# Altium PCB MN_BUCK113b_PCB.PcbDoc
Units mil, origin at the board's own origin, x right, y up, seen from the top; angles counter-clockwise.
Board outline 6000 x 4000 mil, 2 copper layers (Top Layer, Bottom Layer); 81 components, 43 nets, 217 pads, 0 vias.
Unrouted connection lines stored in the file: 164.
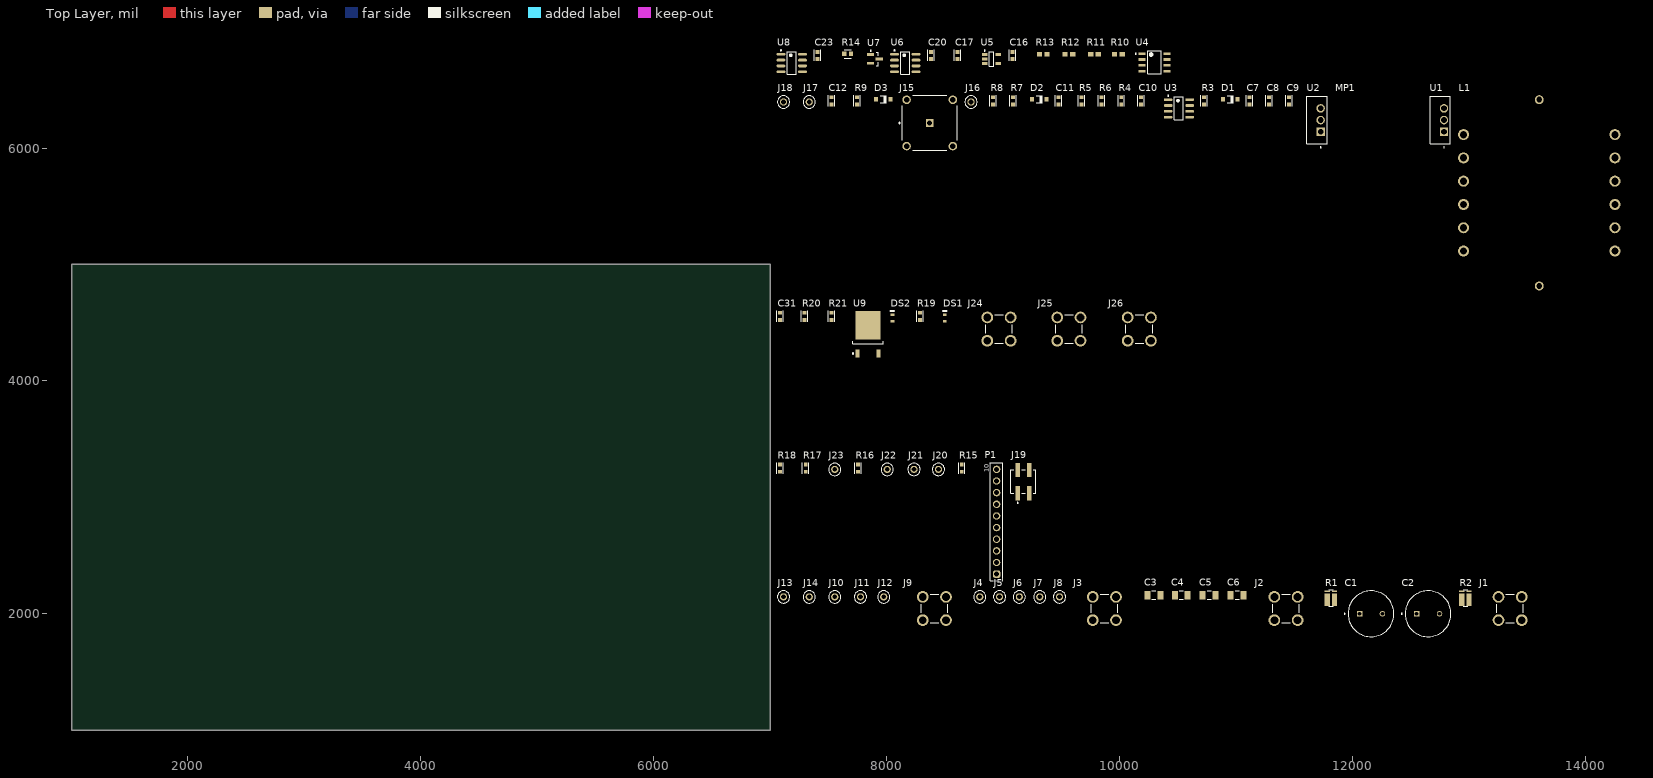
[diagram p0: Top Layer view]
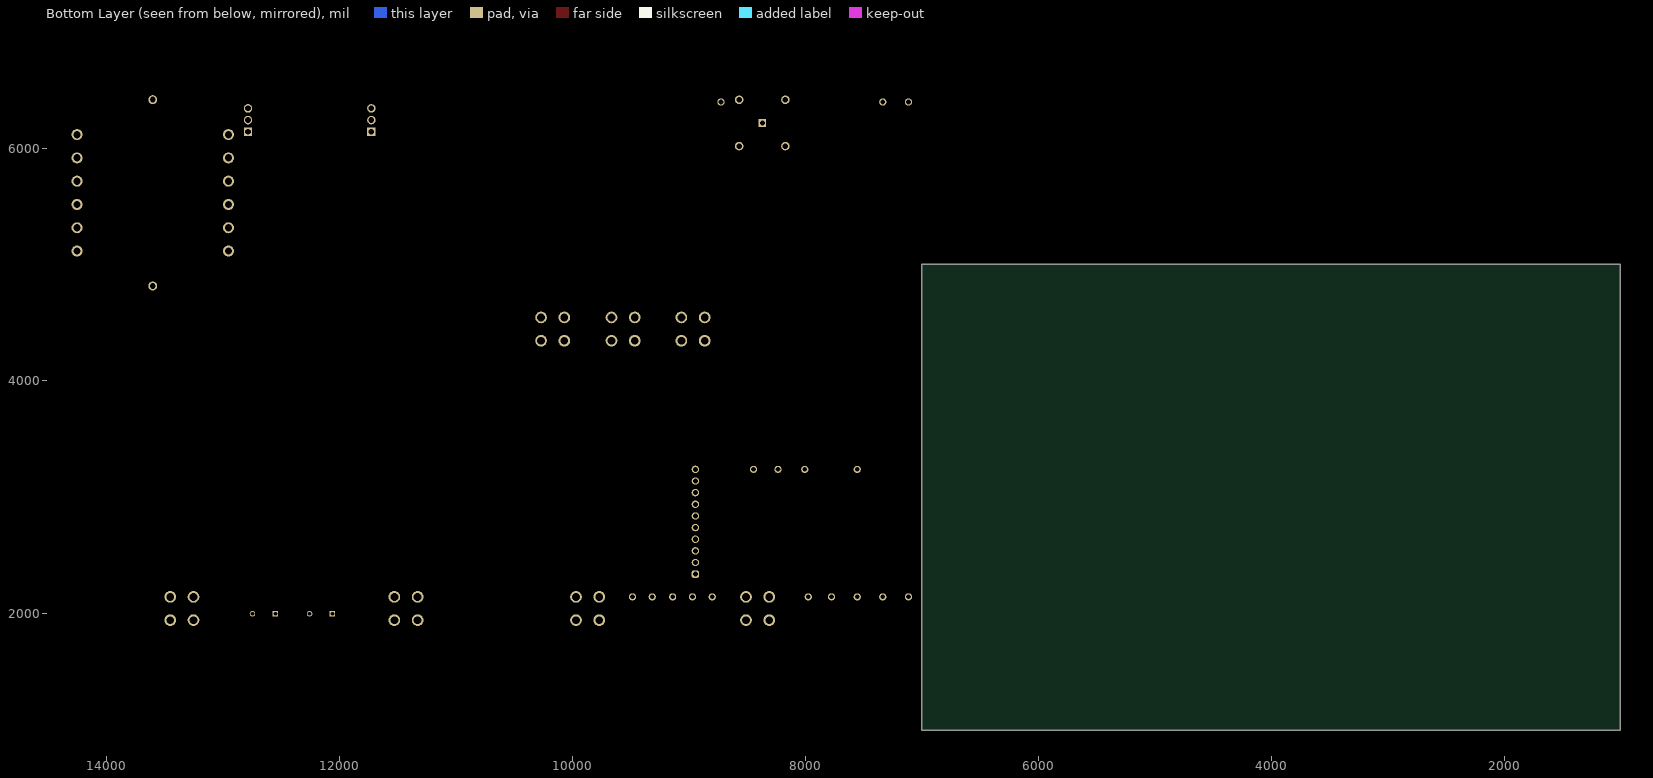
[diagram p1: Bottom Layer view, seen from below]

## Layer stack, top to bottom
Top Solder: solder mask 0.4, Solder Resist, Dk 3.5
Top Layer: signal copper 1.4
Dielectric 1: dielectric 12.6, FR-4, Dk 4.8
Bottom Layer: signal copper 1.4
Bottom Solder: solder mask 0.4, Solder Resist, Dk 3.5

## Board outline
1000,1000 7000,1000 7000,5000 1000,5000

## Design rules (kind name [scope] priority, off if disabled: settings)
Clearance [All] p1: gap=10 ignorepadtopadclearanceinfootprint=FALSE except(0: Arc-Hole Track-Hole SMDPad-Hole THPad-Hole Via-Hole Fill-Hole Poly-Hole Region-Hole Text-Hole)
PolygonConnect [All] p1: connectstyle=Relief reliefconductorwidth=10 reliefentries=4 polygonreliefangle="90 Angle" airgapwidth=10
RoomDefinition U_Sensing [InComponentClass('U_Sensing')] p1: confinementstyle=ConfineIn formatcopy=TRUE lockcomponents=FALSE outline 7045,6615 10450,6615 10450,6955 7045,6955
RoomDefinition U_PowerStage [InComponentClass('U_PowerStage')] p2: confinementstyle=ConfineIn formatcopy=TRUE lockcomponents=FALSE outline 7045,4765 14315,4765 14315,6565 7045,6565
RoomDefinition U_HotelRail [InComponentClass('U_HotelRail')] p3: confinementstyle=ConfineIn formatcopy=TRUE lockcomponents=FALSE outline 7045,3460 10455,3460 10455,4715 7045,4715
RoomDefinition U_DigitalInterface [InComponentClass('U_DigitalInterface')] p4: confinementstyle=ConfineIn formatcopy=TRUE lockcomponents=FALSE outline 7045,2270 9295,2270 9295,3410 7045,3410
RoomDefinition TOPSHEET [InComponentClass('TOPSHEET')] p5: confinementstyle=ConfineIn formatcopy=TRUE lockcomponents=FALSE outline 7045,1060 13640,1060 13640,2315 7045,2315
RoutingVias [All] p1: holewidth=28 width=50 viastyle="Through Hole" minholewidth=28 minwidth=50 maxholewidth=28 maxwidth=50
SolderMaskExpansion [All] p1: expansion=4 istentingtop=FALSE
Width [All] p1: maxlimit=10 minlimit=10 preferedwidth=10
30 further rules are at their usual default settings.

## Classes and differential pairs
component class U_Sensing: C13 C14 C15 C16 C17 C18 C19 C20 C21 C22 C23 C24 C25 R10 R11 R12 R13 R14 U4 U5 U6 U7 U8
component class U_PowerStage: C7 C8 C9 C10 C11 C12 D1 D2 D3 J15 J16 J17 J18 L1 MP1 R3 R4 R5 R6 R7 R8 R9 U1 U2 U3
component class U_HotelRail: C30 C31 DS1 DS2 J24 J25 J26 R19 R20 R21 U9
component class U_DigitalInterface: C26 C27 C28 C29 J19 J20 J21 J22 J23 P1 R15 R16 R17 R18
component class TOPSHEET: C1 C2 C3 C4 C5 C6 J1 J2 J3 J4 J5 J6 J7 J8 J9 J10 J11 J12 J13 J14 R1 R2

## Components (designator, comment, footprint, x,y, rotation, side; value= is the part's Value field where it differs from the comment)
C1 "470uF 10mm" CAPPRD500W60D1000H2200 12160,2000 r0 top
C2 "470uF 10mm" CAPPRD500W60D1000H2200 12650,2000 r0 top
C3 "12065C475KAT2A" FP-1206-L_3_2_0_2-W_1_6_0-IPC_B 10295,2160 r0 top
C4 "12065C475KAT2A" FP-1206-L_3_2_0_2-W_1_6_0-IPC_B 10530,2160 r0 top
C5 "12065C475KAT2A" FP-1206-L_3_2_0_2-W_1_6_0-IPC_B 10770,2160 r0 top
C6 "12065C475KAT2A" FP-1206-L_3_2_0_2-W_1_6_0-IPC_B 11010,2160 r0 top
C7 "0.10µF" SMD-0603-RES 11115,6405 r0 top
C8 "0.10µF" SMD-0603-RES 11285,6405 r0 top
C9 "10µF" SMD-0603-RES 11455,6405 r0 top
C10 "0.1µF" SMD-0603-RES 10185,6405 r0 top
C11 "0.1µF" SMD-0603-RES 9475,6405 r0 top
C12 "1µF" SMD-0603-RES 7525,6405 r0 top
C16 "2.2µF" SMD-0603-RES 9080,6795 r0 top
C17 "10µF" SMD-0603-RES 8610,6795 r0 top
C20 "10pF" SMD-0603-RES 8380,6795 r0 top
C23 "10pF" SMD-0603-RES 7405,6795 r0 top
C31 "10µF" SMD-0603-RES 7085,4555 r0 top
D1 "1N4148W-7-F" DIOD-SOD123-2_V 10950,6420 r0 top
D2 "1N4148W-7-F" DIOD-SOD123-2_V 9310,6420 r0 top
D3 "1N4148W-7-F" DIOD-SOD123-2_V 7970,6420 r0 top
DS1 "TLMS1000-GS08" VISH-TLMS1000_V 8500,4540 r90 top
DS2 "TLMS1000-GS08" VISH-TLMS1000_V 8050,4540 r90 top
J1 "CT3151-2" CALTEST_CT3151-2 13355,2045 r0 top
J2 "CT3151-0" CT3151-0 11430,2045 r0 top
J3 "CT3151-2" CALTEST_CT3151-2 9870,2045 r0 top
J4 "5001" FP-5001-MFG 8800,2145 r0 top
J5 "5001" FP-5001-MFG 8970,2145 r0 top
J6 "5001" FP-5001-MFG 9140,2145 r0 top
J7 "5001" FP-5001-MFG 9315,2145 r0 top
J8 "5001" FP-5001-MFG 9485,2145 r0 top
J9 "CT3151-0" CT3151-0 8410,2045 r0 top
J10 "5001" FP-5001-MFG 7555,2145 r0 top
J11 "5001" FP-5001-MFG 7775,2145 r0 top
J12 "5001" FP-5001-MFG 7975,2145 r0 top
J13 "5001" FP-5001-MFG 7115,2145 r0 top
J14 "5001" FP-5001-MFG 7335,2145 r0 top
J15 "1-1337445-0" FP-1-1337445-0-MFG 8370,6215 r0 top
J16 "5001" FP-5001-MFG 8725,6395 r0 top
J17 "5001" FP-5001-MFG 7335,6395 r0 top
J18 "5001" FP-5001-MFG 7115,6395 r0 top
J19 "M20-8760242" FP-M20-8760242-MFG 9175,3135 r0 top
J20 "5001" FP-5001-MFG 8445,3240 r0 top
J21 "5001" FP-5001-MFG 8235,3240 r0 top
J22 "5001" FP-5001-MFG 8005,3240 r0 top
J23 "5001" FP-5001-MFG 7555,3240 r0 top
J24 "CT3151-2" CALTEST_CT3151-2 8965,4445 r0 top
J25 "CT3151-2" CALTEST_CT3151-2 9565,4445 r0 top
J26 "CT3151-0" CT3151-0 10170,4445 r0 top
L1 "B65816C1512T001" B65816C1512T001 12955,6115 r0 top
MP1 "507302B00000G" FP-507302B00000G-MFG 12225,6075 r0 top
P1 "61301011121" 61301011121 8945,2790 r90 top
R1 "2.5m, 2%" OHMITE_FC4L32 11815,2135 r0 top value=2.5m
R2 "2.5m, 2%" OHMITE_FC4L32 12970,2135 r0 top value=2.5m
R3 "1" SMD-0603-RES 10725,6405 r0 top
R4 "10" SMD-0603-RES 10015,6405 r0 top
R5 "10" SMD-0603-RES 9675,6405 r0 top
R6 "10" SMD-0603-RES 9845,6405 r0 top
R7 "1" SMD-0603-RES 9085,6405 r0 top
R8 "10" SMD-0603-RES 8915,6405 r0 top
R9 "1" SMD-0603-RES 7745,6405 r0 top
R10 "TNPW0603100KBEEA" RESC1609X55X30ML10T20 9990,6805 r0 top
R11 "TNPW0603100KBEEA" RESC1609X55X30ML10T20 9785,6805 r0 top
R12 "TNPW0603100KBEEA" RESC1609X55X30ML10T20 9565,6805 r0 top
R13 "TNPW0603100KBEEA" RESC1609X55X30ML10T20 9345,6805 r0 top
R14 "CRCW06032K94FKEA" FP-CRCW0603-e3-IPC_B 7665,6810 r0 top
R15 "120" SMD-0603-RES 8645,3250 r0 top
R16 "120" SMD-0603-RES 7755,3250 r0 top
R17 "120" SMD-0603-RES 7305,3250 r0 top
R18 "120" SMD-0603-RES 7085,3250 r0 top
R19 "120" SMD-0603-RES 8285,4555 r0 top
R20 "100" SMD-0603-RES 7295,4555 r0 top
R21 "100" SMD-0603-RES 7525,4555 r0 top
U1 "IRFZ48NPBF" TO254P1041X444X1930-3 12755,6240 r90 top
U2 "IRFZ48NPBF" TO254P1041X444X1930-3 11695,6240 r90 top
U3 "LM5109BMAX" M08A_L 10510,6340 r0 top
U4 "LM358DR" FP-D0008A-MFG 10300,6735 r0 top
U5 "LP2985-50DBVR" DBV0005A_M 8900,6765 r0 top
U6 "LT1999CS8-50#PBF" LT-S8-8_L 8160,6730 r0 top
U7 "ADR1581ARTZ-REEL7" ADI-RT-3_N 7900,6765 r0 top
U8 "LT1999CS8-50#PBF" LT-S8-8_L 7185,6730 r0 top
U9 "LD1117ADT33TR" TO-252_L 7840,4400 r90 top

## Footprints (in the part's own frame and the unit in brackets; to place one, negate y for a bottom-side part, rotate by r counter-clockwise, add the part's x,y. Pads: shape width x height; smd on the part's side, far side on the other; paste and mask are expansions set on the pad)
61301011121 [mm]
  rrect50% 1.6x1.6 hole 1.1: 1(-11.43,0)
  round 1.6 hole 1.1: 2(-8.89,0) 3(-6.35,0) 4(-3.81,0) 5(-1.27,0) 6(1.27,0) 7(3.81,0) 8(6.35,0) 9(8.89,0) 10(11.43,0)
  silkscreen extent -12.85,-1.35 12.85,1.35, body extent -12.7,-1.27 12.7,1.27, height 8.57
ADI-RT-3_N [mm]
  rect 1.6x0.6 smd: 1(-0.96,0.96) 2(-0.96,-0.96) 3(0.96,0)
  silkscreen extent -1.02,-1.5 0.7,1.92, body extent -0.7,-1.52 0.7,1.52, height 1.12
B65816C1512T001 [mm]
  round 2.4 hole 1.6: 1(0,0) 2(0,-5.08) 3(0,-10.16) 4(0,-15.24) 5(0,-20.32) 6(0,-25.4) 7(33.02,-25.4) 8(33.02,-20.32) 9(33.02,-15.24) 10(33.02,-10.16) 11(33.02,-5.08) 12(33.02,0)
  round 1.95 hole 1.3: G1(16.51,7.62) G2(16.51,-33.02)
CALTEST_CT3151-2 [mm]
  round 2.55 hole 1.7: 1(-2.54,2.54) 2(2.54,2.54) 3(-2.54,-2.54) 4(2.54,-2.54)
  silkscreen extent -2.9,-3.1 2.9,3.1, body extent -6.62,-24.53 6.88,3.17, height 19.44
CAPPRD500W60D1000H2200 [mm]
  rect 1.2x1.2 hole 0.85: 1(-2.5,0)
  round 1.2 hole 0.85: 2(2.5,0)
  silkscreen extent -5.85,-5 5,5
CT3151-0 [mm]
  round 2.55 hole 1.7: 1(-2.54,2.54) 2(2.54,2.54) 3(-2.54,-2.54) 4(2.54,-2.54)
  silkscreen extent -2.9,-3.1 2.9,3.1, body extent -6.62,-24.53 6.88,3.17, height 19.44
DBV0005A_M [mm]
  rrect15% 1.2x0.65 smd: 1(-1.475,0.95) 2(-1.475,0) 3(-1.475,-0.95) 4(1.475,-0.95) 5(1.475,0.95)
  silkscreen extent -1.6,-1.55 0.5,1.95, body extent -1.42,-1.46 1.42,1.46, height 1.08
DIOD-SOD123-2_V [mm]
  rect 0.9x0.95 smd: 1(-1.575,0) 2(1.575,0)
  silkscreen extent -0.64,-0.82 0.64,0.77, body extent -1.35,-0.77 1.35,0.77, height 1.45
FP-1-1337445-0-MFG [mm]
  rect 1.7x1.7 hole 1.1 paste-2539.97 mask+0: 1(0,0)
  round 1.85 hole 1.2 paste-2539.97 mask+0: 2(-5.05,5.05) 3(5.05,5.05) 4(-5.05,-5.05) 5(5.05,-5.05)
  silkscreen extent -6.72,-6 6,6, body extent -6.1,-6.1 6.1,6.1, height 0.25
FP-1206-L_3_2_0_2-W_1_6_0-IPC_B [mil]
  rect 51.36x71.11 smd paste+0 mask+0: 1(-55.15,0) 2(55.15,0)
  silkscreen extent -18,-36 18,36, body extent -91,-45 91,45, height 10
FP-5001-MFG [mm]
  round 1.57 hole 1.016 paste-2539.97 mask+0: 1(0,0)
  silkscreen extent -1.35,-1.34 1.35,1.34, body extent -1.45,-1.45 1.45,1.45, height 0.25
FP-507302B00000G-MFG [mil]
  body extent -375,-380 375,0, height 875
FP-CRCW0603-e3-IPC_B [mil]
  rect 36.81x37.88 smd paste+0 mask+0: 1(-28.17,0) 2(28.17,0)
  silkscreen extent -30,-37 30,35, body extent -56,-29 56,29, height 10
FP-D0008A-MFG [mm]
  rrect17% 1.55x0.6 smd paste+0 mask+0: 1(-2.7,1.905) 2(-2.7,0.635) 3(-2.7,-0.635) 4(-2.7,-1.905) 5(2.7,-1.905) 6(2.7,-0.635) 7(2.7,0.635) 8(2.7,1.905)
  silkscreen extent -4.17,-2.5 1.5,2.5, body extent -3.57,-2.75 3.57,2.75, height 0.25
FP-M20-8760242-MFG [mm]
  rect 1x3.15 smd paste+0 mask+0: 1(-1.27,-2.525) 2(-1.27,2.525) 3(1.27,-2.525) 4(1.27,2.525)
  silkscreen extent -2.72,-4.77 2.72,2.58, body extent -2.82,-4.2 2.82,4.2, height 0.25
LT-S8-8_L [mm]
  oval 1.9x0.6 smd: 1(-2.35,1.905) 2(-2.35,0.635) 3(-2.35,-0.635) 4(-2.35,-1.905) 5(2.35,-1.905) 6(2.35,-0.635) 7(2.35,0.635) 8(2.35,1.905)
  silkscreen extent -2.47,-2.5 1,2.88, body extent -2,-2.5 2,2.5, height 1.76
M08A_L [mm]
  oval 1.9x0.6 smd: 1(-2.35,1.905) 2(-2.35,0.635) 3(-2.35,-0.635) 4(-2.35,-1.905) 5(2.35,-1.905) 6(2.35,-0.635) 7(2.35,0.635) 8(2.35,1.905)
  silkscreen extent -2.47,-2.5 1,2.88, body extent -2,-2.5 2,2.5, height 1.75
OHMITE_FC4L32 [mm]
  rect 1.15x2.7 smd: 1(-0.8,-0.35) 2(0.8,-0.35)
  rect 1.15x0.35 smd: 1S(-0.8,1.5) 2S(0.8,1.5)
  silkscreen extent -0.5,-1.8 0.5,1.8, body extent -0.8,-1.6 0.8,1.6, height 0.5
RESC1609X55X30ML10T20 [mm]
  rect 1.15x1.05 smd: 1(-0.825,0) 2(0.825,0)
  body extent -0.85,-0.48 0.85,0.48, height 0.55
SMD-0603-RES [mm]
  rect 0.85x0.85 smd: 1(0,0.775) 2(0,-0.775)
  silkscreen extent -0.7,-1.2 0.7,1.2, body extent -0.4,-0.85 0.4,0.85, height 0.56
TO254P1041X444X1930-3 [mm]
  rect 1.845x1.845 hole 1.23: 1(-2.54,-0.81)
  round 1.845 hole 1.23: 2(0,-0.81) 3(2.54,-0.81)
  silkscreen extent -6.06,-2.22 5.21,2.22, body extent -5.21,-2.22 5.21,2.22, height 19.3
TO-252_L [mm]
  rect 1.8x0.9 smd: 1(-4.2,2.28) 3(-4.2,-2.28)
  rect 6.2x5.45 smd: 4(2,0)
  silkscreen extent -4.32,-3.3 -1.5,3.4, body extent -2.05,-3.3 4.15,3.3, height 2.4
VISH-TLMS1000_V [mm]
  rect 0.6x0.8 smd: 1(-0.725,0) 2(0.725,0)
  silkscreen extent 1.52,-0.4 1.52,0.4, body extent -0.8,-0.4 0.8,0.4, height 0.65

## Part data
C1 C2: library part B41856C7477M000, Package=None, Availability=Unavailable, MF="{'manufacturer': u'EPCOS'}", MP=B41856C7477M000, Price=None
C3 C4 C5 C6: library part CMP-2000-07581-3, "CAP CER 4.7UF 50V X7R 1206", Capacitance=10uF, Case Code (Imperial)=1206, Case Code (Metric)=3216, Dielectric=X7R, Manufacturer="Kyocera AVX", Max Operating Temperature=125°C, Min Operating Temperature=-55°C, Package Quantity=1, Tolerance=10%, Voltage Rating=50V, Case/Package=1206, Construction=Flat, Contact Plating=Tin, Depth=1.6mm, Dissipation Factor=2.5%, Lead Free="Lead Free", Length=3.2mm, Manufacturer Part Number=12065C475KAT2A, Mount="Surface Mount", Packaging="Tape and Reel", Radiation Hardening=No, REACH SVHC="No SVHC", RoHS Compliant=Yes, Series=-, Termination=SMD/SMT, Thickness=0.07inch, Voltage Rating (DC)=50V, Width=1.6mm
C7 C8: "CAP CER 0.1UF 16V X7R 0603", Digi-Key Part Number=490-1532-1-ND, Manufacturer="Murata Electronics North America", Operating Temperature="-55°C ~ 125°C", Package / Case="0603 (1608 Metric)", Part Number=GRM188R71C104KA01D, Ratings=-, Temperature Coefficient=X7R, Tolerance=±10%, Voltage=16V, @ qty=0, Applications="General Purpose", Datasheets=http://www.murata.com/~/media/webrenewal/support/library/catalog/products/capacitor/mlcc/c02e.pdf, Factory Stock=0, Features=-, Height - Seated (Max)=-, Image=//media.digikey.com/Renders/Murata%20Renders/ZRB-SERIES-0402.jpg, Lead Spacing=-, Lead Style=-, Minimum Quantity=1, Mounting Type="Surface Mount, MLCC", Packaging="Cut Tape (CT)", Part Status=Active, Quantity Available=4520200, Series=GRM, Size / Dimension="0.063\" L x 0.031\" W (1.60mm x 0.80mm)", Thickness (Max)="0.035\" (0.90mm)", Unit Price (USD)=0.1
C9 C17: "CAP CER 10UF 10V X5R 0603", Digi-Key Part Number=490-10474-1-ND, Manufacturer="Murata Electronics North America", Operating Temperature="-55°C ~ 85°C", Package / Case="0603 (1608 Metric)", Part Number=GRM188R61A106KE69D, Ratings=-, Temperature Coefficient=X5R, Tolerance=±10%, Voltage=10V, @ qty=0, Applications="General Purpose", Datasheets=http://www.murata.com/~/media/webrenewal/support/library/catalog/products/capacitor/mlcc/c02e.pdf, Factory Stock=0, Features="Derating Recommended", Height - Seated (Max)=-, Image=//media.digikey.com/Renders/Murata%20Renders/ZRB-SERIES-0402.jpg, Lead Spacing=-, Lead Style=-, Minimum Quantity=1, Mounting Type="Surface Mount, MLCC", Packaging="Cut Tape (CT)", Part Status=Active, Quantity Available=59221, Series=GRM, Size / Dimension="0.063\" L x 0.031\" W (1.60mm x 0.80mm)", Thickness (Max)="0.037\" (0.95mm)", Unit Price (USD)=0.18
  C9: ComponentLink1Description="New link"
C10 C11 C16: "CAP CER 2.2UF 16V X5R 0603", Digi-Key Part Number=490-3296-1-ND, Manufacturer="Murata Electronics North America", Operating Temperature="-55°C ~ 85°C", Package / Case="0603 (1608 Metric)", Part Number=GRM188R61C225KE15D, Ratings=-, Temperature Coefficient=X5R, Tolerance=±10%, Voltage=16V, @ qty=0, Applications="General Purpose", Datasheets=http://www.murata.com/~/media/webrenewal/support/library/catalog/products/capacitor/mlcc/c02e.pdf, Factory Stock=0, Features=-, Height - Seated (Max)=-, Image=//media.digikey.com/Renders/Murata%20Renders/ZRB-SERIES-0402.jpg, Lead Spacing=-, Lead Style=-, Minimum Quantity=1, Mounting Type="Surface Mount, MLCC", Packaging="Cut Tape (CT)", Part Status=Active, Quantity Available=1668676, Series=GRM, Size / Dimension="0.063\" L x 0.031\" W (1.60mm x 0.80mm)", Thickness (Max)="0.035\" (0.90mm)", Unit Price (USD)=0.12
C12: "CAP CER 1UF 25V X5R 0603", Digi-Key Part Number=490-3897-1-ND, Manufacturer="Murata Electronics North America", Operating Temperature="-55°C ~ 85°C", Package / Case="0603 (1608 Metric)", Part Number=GRM188R61E105KA12D, Ratings=-, Temperature Coefficient=X5R, Tolerance=±10%, Voltage=25V, @ qty=0, Applications="General Purpose", Datasheets=http://www.murata.com/~/media/webrenewal/support/library/catalog/products/capacitor/mlcc/c02e.pdf, Factory Stock=0, Features=-, Height - Seated (Max)=-, Image=//media.digikey.com/Renders/Murata%20Renders/ZRB-SERIES-0402.jpg, Lead Spacing=-, Lead Style=-, Minimum Quantity=1, Mounting Type="Surface Mount, MLCC", Packaging="Cut Tape (CT)", Part Status=Active, Quantity Available=1883393, Series=GRM, Size / Dimension="0.063\" L x 0.031\" W (1.60mm x 0.80mm)", Thickness (Max)="0.035\" (0.90mm)", Unit Price (USD)=0.1
C20 C23: "CAP CER 10PF 50V NP0 0603", Digi-Key Part Number=490-3570-1-ND, Manufacturer="Murata Electronics North America", Operating Temperature="-55°C ~ 125°C", Package / Case="0603 (1608 Metric)", Part Number=GQM1885C1H100JB01D, Ratings=-, Temperature Coefficient="C0G, NP0", Tolerance=±5%, Voltage=50V, @ qty=0, Applications="RF, Microwave, High Frequency", Datasheets=http://www.murata.com/~/media/webrenewal/support/library/catalog/products/capacitor/mlcc/c02e.pdf, Factory Stock=0, Features="High Q, Low Loss", Height - Seated (Max)=-, Image=//media.digikey.com/Renders/Murata%20Renders/0603%28LQG18%29.jpg, Lead Spacing=-, Lead Style=-, Minimum Quantity=1, Mounting Type="Surface Mount, MLCC", Packaging="Cut Tape (CT)", Part Status=Active, Quantity Available=26659, Series=GQM, Size / Dimension="0.063\" L x 0.031\" W (1.60mm x 0.80mm)", Thickness (Max)="0.035\" (0.90mm)", Unit Price (USD)=0.6
C31: "CAP CER 10UF 6.3V X5R 0603", Digi-Key Part Number=490-3896-1-ND, Manufacturer="Murata Electronics North America", Operating Temperature="-55°C ~ 85°C", Package / Case="0603 (1608 Metric)", Part Number=GRM188R60J106ME47D, Ratings=-, Temperature Coefficient=X5R, Tolerance=±20%, Voltage=6.3V, @ qty=0, Applications="General Purpose", Datasheets=http://www.murata.com/~/media/webrenewal/support/library/catalog/products/capacitor/mlcc/c02e.pdf, Factory Stock=0, Features=-, Height - Seated (Max)=-, Image=//media.digikey.com/Renders/Murata%20Renders/ZRB-SERIES-0402.jpg, Lead Spacing=-, Lead Style=-, Minimum Quantity=1, Mounting Type="Surface Mount, MLCC", Packaging="Cut Tape (CT)", Part Status=Active, Quantity Available=1578882, Series=GRM, Size / Dimension="0.063\" L x 0.031\" W (1.60mm x 0.80mm)", Thickness (Max)="0.035\" (0.90mm)", Unit Price (USD)=0.15
D1 D2 D3: library part CMP-2000-04932-2, "Fast Switching Diode, 100 V, 0.15 A, -65 to 150 degC, 2-Pin?SOD123, RoHS, Tape and Reel", If - Forward Current=0.15A, Ir - Reverse Current=1uA, Manufacturer=DiodesIncorporated, Max Surge Current=2A, Maximum Operating Temperature=+150C, Minimum Operating Temperature=-65C, Operating Temperature Range=-65Cto+150C, Package / Case=SOD-123, Package Reference=SOD123-2, Peak Reverse Voltage=100V, Vf - Forward Voltage=1.25V, Brand=DiodesIncorporated, Configuration=Single, Datasheet URL=http://www.farnell.com/datasheets/1915529.pdf, Datasheet Version="Rev. 24-2, 10/2013", Factory Pack Quantity=3000, Height=1.25mm, Length=2.85mm, Manufacturer Part Number=1N4148W-7-F, Manufacturer URL=http://www.diodes.com/, Mounting Style=SMD/SMT, Package URL=http://www.diodes.com/datasheets/ds18004.pdf, Packaging=Reel, Product=SwitchingDiodes, Product Category=Diodes-GeneralPurpose,Power,Switching, Recovery Time=4ns, RoHS=True, Series=1N4148, Type=SwitchingDiode, Unit Weight=0.000353oz, Width=1.7mm
DS1 DS2: library part CMP-2000-07254-1, "Low Current LED, 40 mW, 1.8 V, -40 to 100 degC, 2-Pin SMD (0603), RoHS, Tape and Reel", Forward Current If=2mA, Forward Voltage=1.8V, LED Colour=Red, Manufacturer=Vishay, Package Description="2-Pin Surface Mount Device, Body 1.6 x 0.8 mm", Package Reference=TLMS1000, Automotive Qualification Standard=AEC-Q100, Bulb Size=1.6mmx0.8mm, Datasheet URL=https://datasheet.ciiva.com/5798/1698881-5798337.pdf, Datasheet Version="Rev. 1.7, 02/2011", LED Mounting=SMD, Lens Shape=Rectangular, Luminous Intensity=4mcd, Manufacturer Part Number=TLMS1000-GS08, Manufacturer URL=http://www.vishay.com/, Mounting Technology=SurfaceMount, MSL=MSL2-1year, Packaging=CutTape, Product Range=-, SVHC=ToBeAdvised, Viewing Angle=80°, Wavelength Typ=636nm
J1 J3 J24 J25: library part CT3151-2_1, "Banana Jack Connector Standard Banana Solder Red", Package=None, Availability=Unavailable, MF="{'manufacturer': u'Cal Test'}", MP=CT3151-2, Price=None
J2 J9 J26: library part CT3151-2, "Banana Jack Connector Standard Banana Solder Red", Package=None, Availability=Unavailable, MF="{'manufacturer': u'Cal Test'}", MP=CT3151-2, Price=None
J4 J5 J6 J7 J8 J10 J11 J12 J13 J14 J16 J17 J18 J20 J21 J22 J23: library part CMP-2000-05181-2, "PC TEST POINT MINIATURE BLACK", Color=Black, Flammability Rating="UL94 V-0", Manufacturer="Keystone Electronics", Package Quantity=100, Body Material=Bronze, Contact Material=Bronze, Contact Plating=Silver, Diameter=2.54mm, Height=0.3inch, Hole Diameter=1.6mm, Housing Color=Black, Inside Diameter=1.27mm, Insulation=Insulated, Insulation Material=Nylon, Lead Free="Lead Free", Length=7.62mm, Manufacturer Part Number=5001, Material=Nylon, Mount="Through Hole", Number of Contacts=1, Number of Ports=1, Orientation=Straight, Outside Diameter=2.54mm, Packaging=Bulk, Plating=Silver, REACH SVHC="No SVHC", RoHS Compliant=Yes, Series=THM, Termination="Through Hole"
J15: library part CMP-03357-000006-1, "CONN BNC JACK STR 50 OHM PCB", Dielectric Material=PTFE, Frequency=4GHz, Insulation Resistance=5GR, Manufacturer="TE Connectivity", Max Operating Temperature=165°C, Min Operating Temperature=-65°C, Operating Frequency="0 to 4Hz", Package Quantity=50, Body Material=Brass, Body Plating=Silver, Connector Type=BNC, Contact Material=Brass, Contact Plating=Silver, Depth=12mm, ELV=Compliant, Fastening Type=Bayonet, Gender=Female, Impedance=50R, Insulation Material=Polytetrafluoroethylene, Length=12mm, Manufacturer Part Number=1-1337445-0, Material=Brass, Max Frequency=4GHz, Mount="Through Hole", Number of Positions=1, Orientation=Straight, Packaging=Bag, PCB Mount Retention=With, PCB Mounting Orientation=Vertical, PCB Thickness=0.126inch, Radiation Hardening=No, RoHS Compliant=Yes, Sealable="No (Without)", Series=BNC, Termination=Solder
J19: library part CMP-15831-000048-1, "CONN HEADER SMD 4POS 2.54MM", Color=Black, Contact Resistance=25mR, Manufacturer=Harwin, Max Current Rating=3A, Max Operating Temperature=105°C, Min Operating Temperature=-40°C, Package Quantity=1000, Connector Type="Male Pin", Contact Material=Bronze, Contact Mating Length=0.228inch, Contact Plating=Gold, Contact Type="Male Pin", Depth=5.08mm, Gender=Male, Housing Color=Black, Housing Material=Nylon, Length=5.08mm, Manufacturer Part Number=M20-8760242, Mount="Surface Mount", Number of Contacts=4, Number of Positions=4, Number of Rows=2, Orientation=Straight, Packaging=Bulk, Pitch=2.54mm, Radiation Hardening=No, RoHS Compliant=Yes, Row Spacing=0.1inch, Series=M20, Termination=Solder
L1: "BOBBIN COIL FORMER RM 12"
MP1: library part CMP-69313-000007-1, "HEATSINK TO-220 2.5W LOW PROFILE", Case/Package=TO-220, Color=Black, Manufacturer="Aavid Thermalloy", Natural Thermal Resistance=24°C/W, Package Quantity=2000, Thermal Resistance @ Forced Air Flow (100 LFM)=10°C/W, Depth=19.05mm, Finish=Anodized, Height=9.65mm, Height Off Base=0.38inch, Lead Free="Lead Free", Length=19.05mm, Manufacturer Part Number=507302B00000G, Material=Aluminium, Mount=Bolt, Package Cooled=TO-220, Packaging=Bulk, Radiation Hardening=No, REACH SVHC="No SVHC", RoHS Compliant=Yes, Series=5073, Shape=Square, Type=Passive, Weight=0.25lb, Width=19.05mm
P1: library part CMP-1502-01082-4, Color=Black, Contact Resistance=20mΩ, Current Rating=3A, Flammability Rating="UL94 V-0", Insulation Resistance=1GΩ, Manufacturer="Wurth Electronics", Max Operating Temperature=105°C, Min Operating Temperature=-40°C, Operating Supply Voltage=250V, Connector Type="Male Pin", Contact Gender=Male, Contact Material=Copper, Contact Mating Length=5.9944mm, Contact Plating=Gold, Gender=Male, Height=8.74mm, Housing Material=PBT, Lead Pitch=2.54mm, Length=2.54mm, Manufacturer Part Number=61301011121, Mount="Through Hole", NexarPartId=18818159, Number of Contacts=10, Number of Pins=10, Number of Positions=10, Number of Rows=1, Orientation=Vertical, Packaging=Bulk, Pitch=2.54mm, REACH SVHC=Unknown, RoHS=Compliant, Termination=Solder, Voltage Rating=250V, Width=25.4mm
R1 R2: "2m, 0612, 2%, 1W", Current=45A, Power=1W, Supplier Part Number 1=FC4L32R002GER-ND, TempOperatingMax=155, TempOperatingMin=-55, Tolerance=2%, Voltage=0.045V, ID=79, Material="Metal Foil", Mfg=Ohmite, MfgPN=FC4L32R002GER, RoHS=True, SMD=True, Supplier 1=Digi-Key
R3 R4 R5 R6 R7 R8: "RES SMD 10 OHM 1% 1/10W 0603", Digi-Key Part Number=P10.0HCT-ND, Manufacturer="Panasonic Electronic Components", Operating Temperature="-55°C ~ 155°C", Package / Case="0603 (1608 Metric)", Part Number=ERJ-3EKF10R0V, Power (Watts)="0.1W, 1/10W", Supplier Device Package=0603, Temperature Coefficient=±100ppm/°C, Tolerance=±1%, @ qty=1500, Composition="Thick Film", Datasheets=http://industrial.panasonic.com/www-cgi/jvcr13pz.cgi?E+PZ+3+AOA0002+ERJ3EKF10R0V+7+WW, Factory Stock=0, Failure Rate=-, Features="Automotive AEC-Q200", Height - Seated (Max)="0.022\" (0.55mm)", Image=//media.digikey.com/Photos/Panasonic%20Photos/MFG_ERJ-P6W%20Series.jpg, Minimum Quantity=1, Number of Terminations=2, Packaging="Cut Tape (CT)", Part Status=Active, Quantity Available=676435, Series=ERJ, Size / Dimension="0.063\" L x 0.031\" W (1.60mm x 0.80mm)", Unit Price (USD)=0.00379
R9: "RES SMD 1 OHM 1% 1/4W 0603", Digi-Key Part Number=P17371CT-ND, Manufacturer="Panasonic Electronic Components", Operating Temperature="-55°C ~ 125°C", Package / Case="0603 (1608 Metric)", Part Number=ERJ-3BQF1R0V, Power (Watts)="0.25W, 1/4W", Supplier Device Package=0603, Temperature Coefficient=±200ppm/°C, Tolerance=±1%, @ qty=1500, Composition="Thick Film", Datasheets=https://industrial.panasonic.com/cdbs/www-data/pdf/RDA0000/AOA0000C239.pdf, Factory Stock=0, Failure Rate=-, Features="Automotive AEC-Q200, Current Sense", Height - Seated (Max)="0.022\" (0.55mm)", Image=//media.digikey.com/Photos/Panasonic%20Photos/MFG_ERJ-P6W%20Series.jpg, Minimum Quantity=1, Number of Terminations=2, Packaging="Cut Tape (CT)", Part Status=Active, Quantity Available=30514, Series=ERJ, Size / Dimension="0.063\" L x 0.031\" W (1.60mm x 0.80mm)", Unit Price (USD)=0.05386
R10 R11 R12 R13: library part CMP-2000-03685-1, Manufacturer="Vishay Dale", Tolerance=0.1%, Manufacturer Part Number=TNPW0603100KBEEA, Part Number=TNPW0603100KBEEA, Size=0603
  R10 R13: Reistance=100k
  R11: Reistance=10k
  R12: Reistance=470k
R14: library part CMP-2000-03188-2, "RES Thick Film, 2.94kΩ, 1%, 0.1W, 100ppm/°C, 0603", Case Code (Imperial)=0603, Case Code (Metric)=1608, Manufacturer=Vishay, Max Operating Temperature=155°C, Max Power Dissipation=100mW, Min Operating Temperature=-55°C, Package Quantity=10, Resistance=2.94kR, Temperature Coefficient=100ppm/°C, Tolerance=1%, Voltage Rating=75V, Case/Package=0603, Composition="Thick Film", Contact Plating=Tin, Depth=0.85mm, Features="Automotive AEC-Q200", Height=0.45mm, Length=1.55mm, Manufacturer Part Number=CRCW06032K94FKEA, Military Standard=Not, Number of Pins=2, Number of Terminations=2, Packaging="Tape and Reel", Power Rating=100mW, Radiation Hardening=No, Termination=SMD/SMT, Weight=7.1E-05oz, Width=0.85mm
R15 R16 R17 R18 R19: "RES SMD 120 OHM 1% 1/10W 0603", Digi-Key Part Number=P120HCT-ND, Manufacturer="Panasonic Electronic Components", Operating Temperature="-55°C ~ 155°C", Package / Case="0603 (1608 Metric)", Part Number=ERJ-3EKF1200V, Power (Watts)="0.1W, 1/10W", Supplier Device Package=0603, Temperature Coefficient=±100ppm/°C, Tolerance=±1%, @ qty=1500, Composition="Thick Film", Datasheets=http://industrial.panasonic.com/www-cgi/jvcr13pz.cgi?E+PZ+3+AOA0002+ERJ3EKF1200V+7+WW, Factory Stock=0, Failure Rate=-, Features="Automotive AEC-Q200", Height - Seated (Max)="0.022\" (0.55mm)", Image=//media.digikey.com/Photos/Panasonic%20Photos/MFG_ERJ-P6W%20Series.jpg, Minimum Quantity=1, Number of Terminations=2, Packaging="Cut Tape (CT)", Part Status=Active, Quantity Available=84623, Series=ERJ, Size / Dimension="0.063\" L x 0.031\" W (1.60mm x 0.80mm)", Unit Price (USD)=0.00379
R20 R21: "RES SMD 100 OHM 1% 1/10W 0603", Digi-Key Part Number=P100HCT-ND, Manufacturer="Panasonic Electronic Components", Operating Temperature="-55°C ~ 155°C", Package / Case="0603 (1608 Metric)", Part Number=ERJ-3EKF1000V, Power (Watts)="0.1W, 1/10W", Supplier Device Package=0603, Temperature Coefficient=±100ppm/°C, Tolerance=±1%, @ qty=1500, Composition="Thick Film", Datasheets=http://industrial.panasonic.com/www-cgi/jvcr13pz.cgi?E+PZ+3+AOA0002+ERJ3EKF1000V+7+WW, Factory Stock=0, Failure Rate=-, Features="Automotive AEC-Q200", Height - Seated (Max)="0.022\" (0.55mm)", Image=//media.digikey.com/Photos/Panasonic%20Photos/MFG_ERJ-P6W%20Series.jpg, Minimum Quantity=1, Number of Terminations=2, Packaging="Cut Tape (CT)", Part Status=Active, Quantity Available=1544120, Series=ERJ, Size / Dimension="0.063\" L x 0.031\" W (1.60mm x 0.80mm)", Unit Price (USD)=0.00379
U1 U2: Package=None, Availability=Unavailable, MF="{'manufacturer': u'Infineon Technologies'}", MP=IRFZ48NPBF, Price=None
U3: library part CMP-0063-00512-2, "High Voltage 1A Peak Half Bridge Gate Driver, 8-pin Narrow SOIC", Manufacturer="National Semiconductor", PackageTopMarking=NSZXTT*L5109*BMA, PowerWise=N, Code_IPC=SOIC127P600-8, Code_JEDEC=MS-012-AA, ComponentLink1Description="LM5109B Datasheet", ComponentLink1URL=http://www.national.com/ds/LM/LM5109B.pdf, ComponentLink2Description="LM5109B Web Page", ComponentLink2URL=http://www.national.com/pf/LM/LM5109B.html, ComponentLink3Description="M08A Package Page", ComponentLink3URL=http://www.national.com/packaging/folders/m08a.html, CompType=MiscPower, DatasheetVersion=Feb-2007, Manufacturer Part Number=LM5109BMAX, PackageDescription="SOIC Narrow, 4.9 x 3.9 x 1.45mm, 8 Lead, 1.27mm Pitch", PackageReference=M08A, PackageVersion="revM, May-2009", PinCount=8, RevisionNote="Component URLs added", RoHS=N
U4: library part CMP-1685-00009-2, "IC OPAMP GP 2 CIRCUIT 8SOIC", Case/Package=SOIC, Dual Supply Voltage=9V, Input Bias Current=250nA, Input Offset Voltage (Vos)=7mV, Manufacturer="Texas Instruments", Max Dual Supply Voltage=16V, Max Operating Temperature=70°C, Max Supply Voltage=32V, Min Dual Supply Voltage=1.5V, Min Operating Temperature=0°C, Min Supply Voltage=3V, Nominal Supply Current=1.2mA, Operating Supply Current=1mA, Output Current=30mA, Package Quantity=2500, Power Supply Rejection Ratio (PSRR)=65dB, Voltage Gain=100dB, Bandwidth=700kHz, Common Mode Rejection Ratio=65dB, Contact Plating=Gold, Gain Bandwidth Product=700kHz, Height=1.58mm, Lead Free="Lead Free", Length=4.9mm, Manufacturer Part Number=LM358DR, Mount="Surface Mount", Number of Amplifiers=2, Number of Channels=2, Number of Circuits=2, Number of Elements=2, Number of Pins=8, Operating Supply Voltage=16V, Output Current per Channel=30mA, Packaging="Tape and Reel", Radiation Hardening=No, REACH SVHC="No SVHC", Slew Rate=0.3V/µs, Unity Gain Bandwidth Product=700kHz, Width=3.91mm
U5: library part CMP-0758-00084-2, "Single Output Low Noise LDO, 150 mA, Fixed 5 V Output, 1.5% Tolerance, 2.2 to 16 V Input, Low IQ, 5-Pin SOT-23 (DBV), -40 to 125 degC, Green (RoHS & no Sb/Br), Tape and Reel", Manufacturer="Texas Instruments", Operating Temperature Range (degC)="-40 to 125", Accuracy (%)=1.5, ComponentLink1Description="Manufacturer URL", ComponentLink1URL=http://www.ti.com/, ComponentLink2Description=Datasheet, ComponentLink2URL=http://www.ti.com/lit/ds/symlink/lp2985-50.pdf, ComponentLink3Description="Package Specification", ComponentLink3URL=http://www.ti.com/litv/pdf/mpds018j, DatasheetVersion=SLVS522N, Fixed Output Options (V)=5, Iout (Max) (A)=0.15, Iq (Typ) (mA)=0.85, Manufacturer Part Number=LP2985-50DBVR, Mounting Technology="Surface Mount", Output Options="Fixed Output", PackageDescription="5-Pin Plastic Small Outline, Body 2.9 x 1.6 mm, Pitch 0.95 mm", PackageReference=DBV0005A, PackageVersion=4073253-4/L, Packing="Tape and Reel", PartNumber=LP2985-50DBVR, RoHS=TRUE, Vdo (Typ) (mV)=280, Vin (V)="2.2 to 16"
U6 U8: library part CMP-0359-03365-2, "Single Channel, High Voltage, Bidirectional Current Sense Amplifier, 2 MHz Typical GBW, 3 V/us Typical SR, 4.5 to 5.5 V, 8-Pin SOIC (S8-8), Commercial, Pb-Free", Linear Technology Part Number=LT1999-50, Manufacturer="Linear Technology", Channels (#)=1, ComponentLink1Description="Manufacturer URL", ComponentLink1URL=http://www.linear.com/, ComponentLink2Description=Datasheet, ComponentLink2URL=http://cds.linear.com/docs/en/datasheet/1999fb.pdf, ComponentLink3Description="Package Specification", ComponentLink3URL=http://cds.linear.com/docs/en/packaging/05081610_G_SO8.pdf, DatasheetVersion="Rev. B", GBW (MHz) Typical=2, Is (mA) Typical=1.55, Manufacturer Part Number=LT1999CS8-50#PBF, Mounting Technology="Surface Mount", PackageDescription="8-Pin Plastic Small Outline, Body 4.9 x 3.9 mm, Pitch 1.27 mm", PackageReference=LT-S8-8, PackageVersion="Rev G", PartNumber=LT1999CS8-50#PBF, RevisionNote="URLs updated", RoHS=Pb-Free, SR (V/us) Typical=3, Type=CSA, Vos (mV) Typical=0.5, Vs Max (V)=5.5, Vs Min (V)=4.5
U7: library part CMP-0784-00432-1, "Micropower, Precision Shunt Voltage Reference, 1.25 V Output, Industrial, 3-pin SOT23 (RT-3), Reel", Manufacturer="Analog Devices", Operating Temp Range="-40 to 85 degC", Code_JEDEC=TO-236-AB, ComponentLink1Description="Manufacturer URL", ComponentLink1URL=http://www.analog.com/en/index.html, ComponentLink2Description=Datasheet, ComponentLink2URL=http://www.analog.com/static/imported-files/data_sheets/ADR1581.pdf, ComponentLink3Description="Package Specification", ComponentLink3URL="http:/www.analog.com/static/imported-files/packages/PKG_PDF/SOT-23-3 (RT)/RT_3.pdf", ComponentLink4Description="URL Link1", ComponentLink4URL="Product URL:http://www.analog.com/en/special-linear-functions/voltage-references/adr1581/products/product.html", DatasheetVersion="Rev. 0", Manufacturer Part Number=ADR1581ARTZ-REEL7, Mounting Technology="Surface Mount", PackageDescription="3-Pin Small Outline Transistor Package, Body 2.9 x 1.3 mm, Pitch 0.96 mm", PackageReference=RT-3, PackageVersion="011909-C, 02/2009", Packing=Reel, PartNumber=ADR1581ARTZ-REEL7, Ref Out TC (ppm/C)=100, Vout=1.25V
U9: library part CMP-0244-00137-1, "1A, Low Drop Positive Voltage Regulator, 3.3V, 3-Pin DPAK, Tape and Reel", Manufacturer=STMicroelectronics, ComponentLink1Description="Manufacturer URL", ComponentLink1URL=http://www.st.com, ComponentLink2Description=Datasheet, ComponentLink2URL=http://www.st.com/internet/com/TECHNICAL_RESOURCES/TECHNICAL_LITERATURE/DATASHEET/CD00002116.pdf, DatasheetVersion=2/12/2011, Manufacturer Part Number=LD1117ADT33TR, PackageDescription="3-Pin Transistor Outline Package 2.28 mm Pitch, 9.7 mm Lead Span (DPAK)", PackageReference=TO-252, PackageVersion=2011

## Nets (pads, with @x,y where several pads share a name; then routed paths per layer and width w, separated by ;. In a path a pad name is that pad's centre, name@x,y a point inside that pad or via, vN(x,y) a via of type N, cw(c..) or ccw(c..) an arc to the next point about the centre after c; other vN are vias at no path point)
+3.3V: C31.1 DS2.1 J19.2 U9.4
+5: C20.1 C23.1 DS1.1 J25.1 J25.2 J25.3 J25.4 P1.1 R14.1 U4.8 U6.1 U6.4 U8.1 U8.4 U9.3
+12: C9.1 J24.1 J24.2 J24.3 J24.4 R9.1 U5.1 U5.3
GH: D1.1 J17.1 R6.2 U1.1
GL: D2.1 J18.1 R8.2 U2.1
HB: C12.1 D3.2 U3.8
IIN+: R1.1S R10.1
IIN-: R1.2S R12.1
IN+: R2.1S U8.2
IN-: R2.2S U8.3
IN_SENSE: R17.1 U4.6 U4.7
IN_SENSE_FILT: J22.1 P1.5 R17.2
IOUT+: J1.1 J1.2 J1.3 J1.4 J14.1 R1.1 U6.2
IOUT-: J3.1 J3.2 J3.3 J3.4 R2.2 U6.3
IOUT_SENSE: R18.1 U4.1 U4.2
IOUT_SENSE_FILT: J23.1 P1.4 R18.2
IV25_ISENSE: R14.2 U7.1
NetC10_2: C10.2 R4.2 U3.2
NetC11_1: C11.1 R5.2 U3.3
NetC16_2: C16.2 C17.1 U5.5
NetC19_2: U5.4
NetC20_2: C20.2 U6.8
NetC22_2: U6.6
NetC23_2: C23.2 U8.8
NetC25_2: U8.6
NetD1_2: D1.2 R3.2
NetD2_2: D2.2 R7.2
NetD3_1: D3.1 R9.2
NetDS1_2: DS1.2 R19.1
NetDS2_2: DS2.2 R20.1
NetR3_1: R3.1 R6.1 U3.7
NetR7_1: R7.1 R8.1 U3.5
NetR20_2: R20.2 R21.1
PWMH: J4.1 J19.1 R4.1
PWML: J13.1 J19.3 R5.1
VIN: C1.1 C1.2 C2.1 C2.2 C3.1 C3.2 C4.1 C4.2 C5.2 C6.2 C7.1 C7.2 C8.1 C8.2 C9.2 C10.1 C11.2 C16.1 C17.2 C31.2 J2.1 J2.2 J2.3 J2.4 J6.1 J7.1 J8.1 J9.1 J9.2 J9.3 J9.4 J10.1 J11.1 J12.1 J15.2 J15.3 J15.4 J15.5 J16.1 J19.4 J26.1 J26.2 J26.3 J26.4 L1.G1 L1.G2 P1.2 R1.2 R11.1 R13.1 R19.2 R21.2 U1.2 U2.3 U3.4 U5.2 U6.5 U7.2 U8.5 U9.1
VIN_ADC: R15.1 U6.7
VIN_ADC_FILT: J21.1 P1.7 R15.2
VIN_DIV: R10.2 R11.2 R12.2 R13.2 U4.3 U4.5
VOUT: C5.1 C6.1 J5.1 L1.7 L1.8 L1.9 L1.10 L1.11 L1.12 R2.1
VOUT_ADC: R16.1 U8.7
VOUT_ADC_FILT: J20.1 P1.8 R16.2
VSW: C12.2 J15.1 L1.1 L1.2 L1.3 U1.3 U2.2 U3.6
pads on no net: L1.4 L1.5 L1.6 P1.3 P1.6 P1.9 P1.10 U3.1 U4.4 U7.3

## Text inside footprints (layer, text, board x,y; h text height)
P1: Top Overlay "10" at 8878.07,3215.2 h40 r90